# Altium PCB Crystal_Breakout_Layout.PcbDoc
Units mil, origin at the board's own origin, x right, y up, seen from the top; angles counter-clockwise.
Board outline 500 x 800 mil, 2 copper layers (Top Layer, Bottom Layer); 4 components, 5 nets, 20 pads, 4 vias.
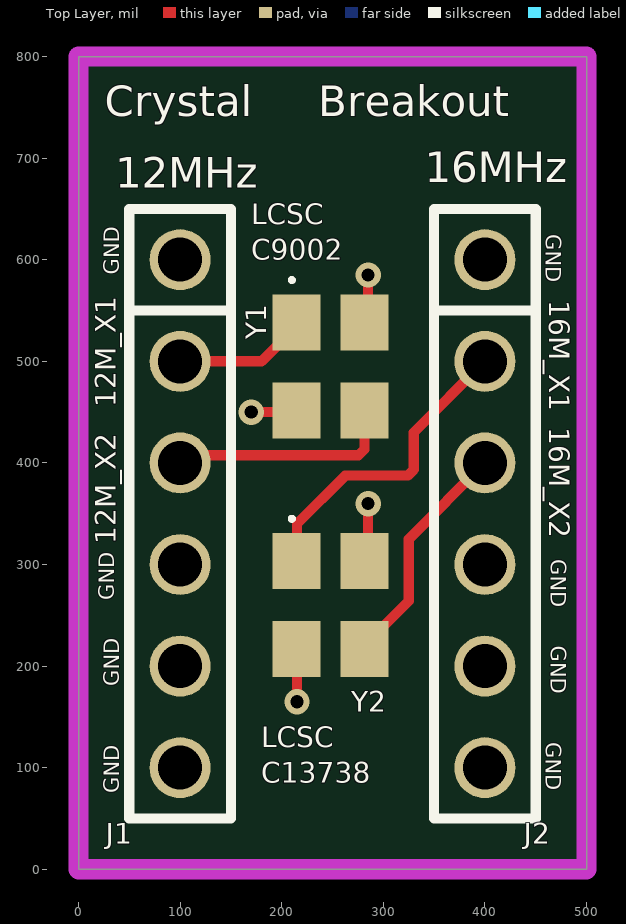
[diagram p0: Top Layer view]
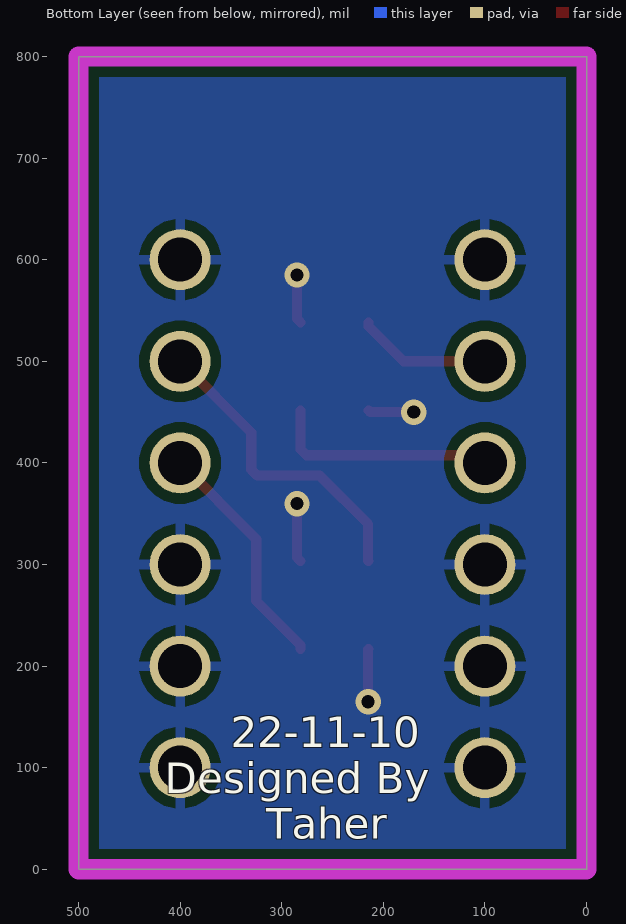
[diagram p1: Bottom Layer view, seen from below]

## Layer stack, top to bottom
Top Solder: solder mask 0.4, Solder Resist, Dk 3.5
Top Layer: signal copper 1.4
Dielectric 1: dielectric 12.6, FR-4, Dk 4.8
Bottom Layer: signal copper 1.4
Bottom Solder: solder mask 0.4, Solder Resist, Dk 3.5

## Board outline
0,0 500,0 500,800 0,800

## Design rules (kind name [scope] priority, off if disabled: settings)
Clearance [All] p1: gap=10 ignorepadtopadclearanceinfootprint=FALSE except(0: Arc-Hole Track-Hole SMDPad-Hole THPad-Hole Via-Hole Fill-Hole Poly-Hole Region-Hole Text-Hole)
PolygonConnect [All] p1: connectstyle=Relief reliefconductorwidth=10 reliefentries=4 polygonreliefangle="90 Angle" airgapwidth=10
RoutingVias [All] p1: holewidth=13 width=25 viastyle="Through Hole" minholewidth=13 minwidth=25 maxholewidth=60 maxwidth=80
SolderMaskExpansion [All] p1: expansion=4 istentingtop=FALSE
UnRoutedNet [All] p1: checkbadconnections=TRUE
Width [All] p1: maxlimit=10 minlimit=6 preferedwidth=10
29 further rules are at their usual default settings.

## Components (designator, comment, footprint, x,y, rotation, side; value= is the part's Value field where it differs from the comment)
J1 "MALE" 6_PIN_100MIL 100,600 r270 top locked
J2 "MALE" 6_PIN_100MIL 400,600 r270 top locked
Y1 "X322512MSB4SI" "Crystal resonator" 250,495 r270 top value=12MHz
Y2 "X322516MLB4SI" "Crystal resonator" 250,260 r270 top value=16MHz

## Footprints (in the part's own frame and the unit in brackets; to place one, negate y for a bottom-side part, rotate by r counter-clockwise, add the part's x,y. Pads: shape width x height; smd on the part's side, far side on the other; paste and mask are expansions set on the pad)
6_PIN_100MIL [mil]
  round 60 hole 43.31: 1(0,0) 2(100,0) 3(200,0) 4(300,0) 5(400,0) 6(500,0)
  silkscreen extent -50,-50 550,50
"Crystal resonator" [mil]
  rect 55.11x47.24 smd: 1(-43.3,-35.43) 2(43.31,-35.43) 3(43.32,31.5) 4(-43.3,31.5)
  silkscreen extent -87,-42 -83,-38, body extent -65,-47 65,47, height 31

## Part data
J1 J2: library part JF_6_PIN_MALE, "Male header- 6 pin 1 row- through Hole", LCSC Part#=C37208, Datasheet=https://datasheet.lcsc.com/szlcsc/1810312320_BOOMELE-Boom-Precision-Elec-C37208_C37208.pdf, Type=Extended
Y1: library part X_12MHz_Res, "SMD Crystal Resonators 12MHz ±10ppm SMD-3225_4P RoHS", LCSC Part#=C9002, Datasheet=https://datasheet.lcsc.com/szlcsc/Yangxing-Tech-X322512MSB4SI_C9002.pdf, MFR Part #=X322512MSB4SI, Type=Basic
Y2: library part X_16Mhz_Res, "±10ppm 16000000Hz -40℃~85℃ 贴片无源晶振 60Ω 9pF SMD3225-4P Crystals ROHS", LCSC Part#=C13738, MFR Part #=X322516MLB4SI, Type=Basic

## Via types
v1: diameter 25, hole 13, Top Layer to Bottom Layer, 4 vias

## Nets (pads, with @x,y where several pads share a name; then routed paths per layer and width w, separated by ;. In a path a pad name is that pad's centre, name@x,y a point inside that pad or via, vN(x,y) a via of type N, cw(c..) or ccw(c..) an arc to the next point about the centre after c; other vN are vias at no path point)
12M_X1: J1.2 Y1.1 | length 132.7
  Top Layer w10: J1.2 180.2,500 214.57,534.37 Y1.1
12M_X2: J1.3 Y1.3 | length 225.4
  Top Layer w10: J1.3 107.5,407.5 275.64,407.5 281.5,413.36 Y1.3
16M_X1: J2.2 Y2.1 | length 309.6
  Top Layer w10: Y2.1 215,303.73 215,340 262.5,387.5 324.14,387.5 330,393.36 330,430 J2.2
16M_X2: J2.3 Y2.3 | length 232.4
  Top Layer w10: Y2.3 281.5,220.62 325,264.12 325,325 J2.3
GND: J1.1 J1.4 J1.5 J1.6 J2.1 J2.4 J2.5 J2.6 Y1.2 Y1.4 Y2.2 Y2.4 | length 203.4
  Top Layer w10: v1(170,450) 212.88,450 Y1.2 ; Y2.2 215,216.26 v1(215,165) ; Y2.4 285,306.8 v1(285,360) ; Y1.4 285,541.8 v1(285,585)

## Polygon pours and split planes (outlines as drawn)
GND on Bottom Layer "GND_L02_P001" (solid, pour order 1): 0,800 500,800 500,0 0,0

## Keep-outs
Keep-Out Layer:
  the board outline again, w20

## Silkscreen, mask and mechanical layers (free items; w line width, h text height)
Top Overlay:
  text "Crystal" at 26,741 h30
  text "Breakout" at 236,741 h30
  text "16MHz" at 341,676 h30
  text "12MHz" at 36,671 h30
  text "LCSC" at 170,635 h20
  text "GND" at 460,625 h15 r270
  text "C9002" at 170,600 h20
  text "GND" at 40,585 h15 r90
  text "16M_X1" at 463.33,560 h20 r270
  text "12M_X1" at 36.67,455 h20 r90
  text "16M_X2" at 463.33,435 h20 r270
  text "12M_X2" at 36.67,320 h20 r90
  text "GND" at 465,305 h15 r270
  text "GND" at 35,265 h15 r90
  text "GND" at 465,220 h15 r270
  text "GND" at 40,180 h15 r90
  text "GND" at 460,125 h15 r270
  text "LCSC" at 180,120 h20
  text "C13738" at 180,85 h20
  text "GND" at 40,75 h15 r90
Bottom Overlay:
  text "22-11-10" at 350,120 h30
  text "Designed By" at 415,75 h30
  text "Taher" at 315,30 h30